# EAGLE board TSOC_RS485_EM (EAGLE 6.6.0)
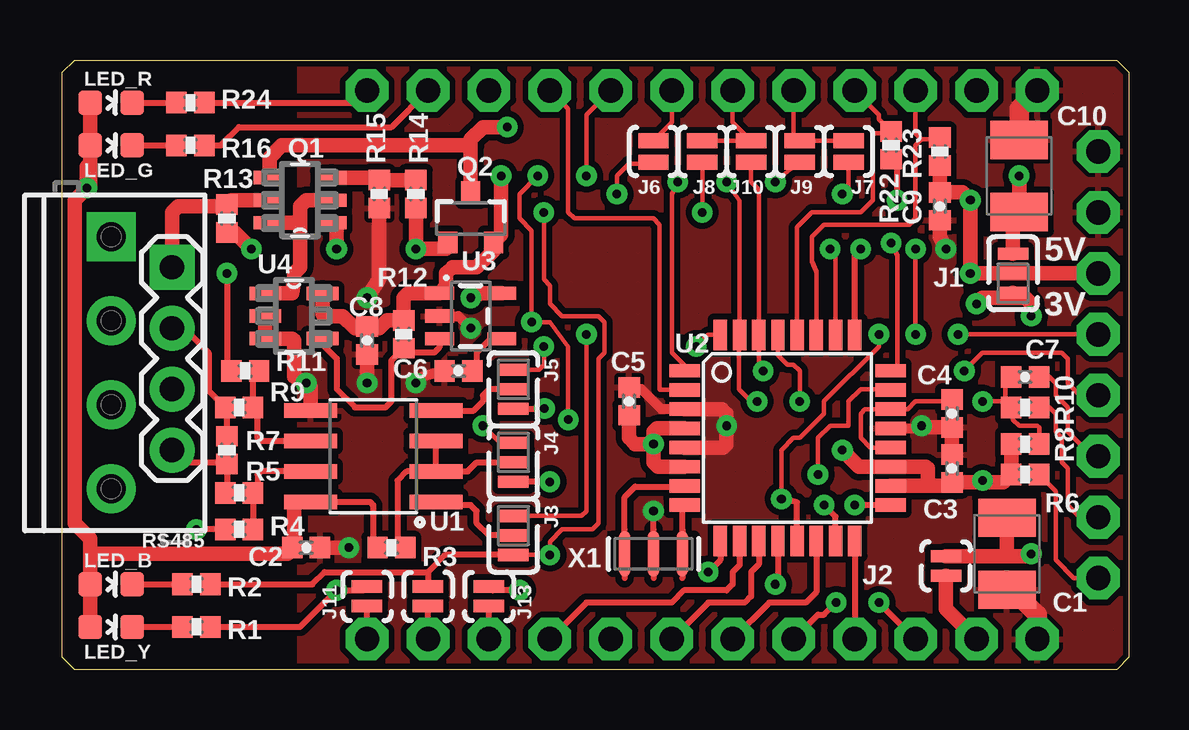
[diagram p0: board, top side]
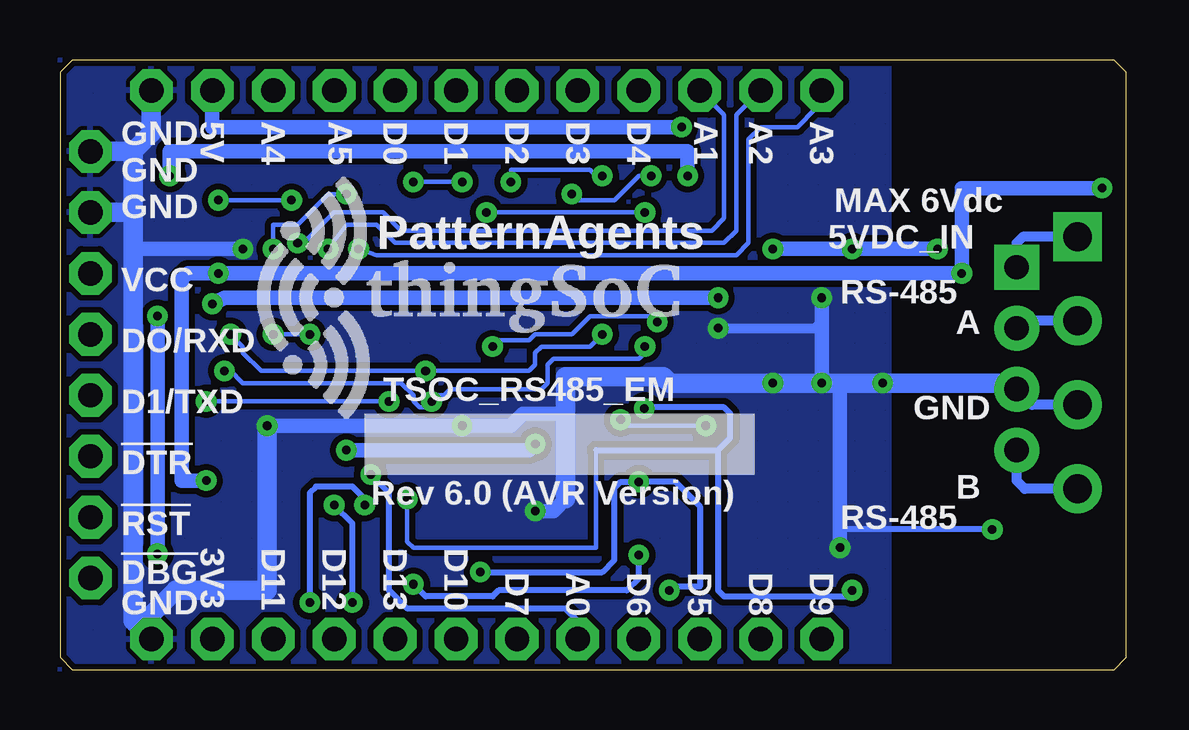
[diagram p1: board, bottom side, seen from below]

Size 44.45 x 25.4 mm. Coordinates in mm from the lower left corner, seen from the top.
Copper layers (1*16): Top 0.035mm / dielectric 1.5mm / Bottom 0.035mm
Design rules "PatternAgents_7mil": minimum track width 7mil, minimum drill 14mil, track to track 7mil, track to pad 7mil, pad to pad 7mil, via to via 7mil, smd to smd 7mil, copper to edge 7mil, drill to drill 7mil, minimum pad ring 12mil, minimum via ring 10mil, stop-mask expansion 4mil, vias tented up to drill 25mil, thermal gap 7mil
Net classes: 1 vcc: width 0.254 mm

## Footprints (pad centres in the part's own frame; a part is rotated, then mirrored left to right if it is on the bottom)
SMC_B = smd 1.6 x 2.4: + -1.5,0; - 1.5,0
0402-CAP = smd 0.85 x 0.9: 1 -0.58,0; 2 0.58,0
JMP-3-1_2 = smd 0.508 x 1.27: 1 -0.813,0; 2 0,0; 3 0.813,0
JMP-2-NC = smd 0.508 x 1.27: 1 -0.401,0; 2 0.413,0
JMP-2-NO = smd 0.635 x 1.27: 1 -0.45,0; 2 0.45,0
1X04 = drill 1.016 pad 1.88 square: 1 0,0 | drill 1.016 pad 1.88: 2 2.54,0; 3 5.08,0; 4 7.62,0
LED-0603 = smd 1 x 1: A 0,-0.877; C 0,0.877
SOT95P280X110-6N = smd 1.27 x 0.559: 1 -1.295,0.94; 2 -1.295,0; 3 -1.295,-0.94; 4 1.295,-0.94; 5 1.295,0; 6 1.295,0.94
SOT23-3 = smd 0.8 x 0.9: 1 -0.95,-1; 2 0.95,-1; 3 0,1.1
0402-RES = smd 0.85 x 0.9: 1 -0.58,0; 2 0.58,0
SCREWTERMINAL-3.5MM-4 = drill 1.2 pad 2.032 square: 1 0,0 | drill 1.2 pad 2.032: 2 3.5,0; 3 7,0; 4 10.5,0
TSOC-BB-S32 = drill 1.016 pad 1.778 octagon: 1B -11.43,-11.43; 1C -11.43,11.43; 1E 19.05,-8.89; 2B -8.89,-11.43; 2C -8.89,11.43; 2E 19.05,-6.35; 3B -6.35,-11.43; 3C -6.35,11.43; 3E 19.05,-3.81; 4B -3.81,-11.43; 4C -3.81,11.43; 4E 19.05,-1.27; 5B -1.27,-11.43; 5C -1.27,11.43; 5E 19.05,1.27; 6B 1.27,-11.43; 6C 1.27,11.43; 6E 19.05,3.81; 7B 3.81,-11.43; 7C 3.81,11.43; 7E 19.05,6.35; 8B 6.35,-11.43; 8C 6.35,11.43; 8E 19.05,8.89; 9B 8.89,-11.43; 9C 8.89,11.43; 10B 11.43,-11.43; 10C 11.43,11.43; 11B 13.97,-11.43; 11C 13.97,11.43; 12B 16.51,-11.43; 12C 16.51,11.43
SO08 = smd 0.61 x 2.21: 1 -1.905,-2.616; 2 -0.635,-2.616; 3 0.635,-2.616; 4 1.905,-2.616; 5 1.905,2.616; 6 0.635,2.616; 7 -0.635,2.616; 8 -1.905,2.616
TQFP32-08 = smd 1.27 x 0.559: 1 -4.293,2.8; 2 -4.293,2; 3 -4.293,1.2; 4 -4.293,0.4; 5 -4.293,-0.4; 6 -4.293,-1.2; 7 -4.293,-2; 8 -4.293,-2.8; 17 4.293,-2.8; 18 4.293,-2; 19 4.293,-1.2; 20 4.293,-0.4; 21 4.293,0.4; 22 4.293,1.2; 23 4.293,2; 24 4.293,2.8 | smd 0.559 x 1.27: 9 -2.8,-4.293; 10 -2,-4.293; 11 -1.2,-4.293; 12 -0.4,-4.293; 13 0.4,-4.293; 14 1.2,-4.293; 15 2,-4.293; 16 2.8,-4.293; 25 2.8,4.293; 26 2,4.293; 27 1.2,4.293; 28 0.4,4.293; 29 -0.4,4.293; 30 -1.2,4.293; 31 -2,4.293; 32 -2.8,4.293
SOT23-5 = smd 0.55 x 1.2: 1 -0.95,-1.3; 2 0,-1.3; 3 0.95,-1.3; 4 0.95,1.3; 5 -0.95,1.3
SOP95P275X110-5N = smd 1.321 x 0.559: 1 -1.194,0.94; 2 -1.194,0; 3 -1.194,-0.94; 4 1.194,-0.94; 5 1.194,0.94
RESONATOR-SMD = smd 0.45 x 1.905: 1 -1.2,0; 2 0,0; 3 1.2,0

## Placement (x,y rotation side)
C1  22uF  [SMC_B]  39.37,4.83 270 top
C2  0.1uF  [0402-CAP]  10.16,5.08 0 top
C3  0.1uF  [0402-CAP]  37.08,8.38 270 top
C4  0.1uF  [0402-CAP]  37.08,10.67 90 top
C5  0.1uF  [0402-CAP]  23.62,11.18 270 top
C6  470pF  [0402-CAP]  16.51,12.45 180 top
C7  0.1uF  [0402-CAP]  40.13,12.19 180 top
C8  0.1uF  [0402-CAP]  12.7,13.72 270 top
C9  0.1uF  [0402-CAP]  36.58,19.3 270 top
C10  22uF  [SMC_B]  39.88,20.57 90 top
J1  JMP-3-1_2  [JMP-3-1_2]  39.62,16.51 90 top
J2  JMP-2-NC  [JMP-2-NC]  36.83,4.32 270 top
J3  JMP-3-1_2  [JMP-3-1_2]  18.8,5.59 270 top
J4  JMP-3-1_2  [JMP-3-1_2]  18.8,8.64 270 top
J5  JMP-3-1_2  [JMP-3-1_2]  18.8,11.68 270 top
J6  [JMP-2-NO]  24.64,21.59 270 top
J7  [JMP-2-NO]  32.77,21.59 270 top
J8  [JMP-2-NO]  26.67,21.59 270 top
J9  [JMP-2-NO]  30.73,21.59 270 top
J10  [JMP-2-NO]  28.7,21.59 270 top
J11  JMP-2-NC  [JMP-2-NC]  12.7,3.05 90 top
J12  JMP-2-NC  [JMP-2-NC]  15.24,3.05 90 top
J13  JMP-2-NC  [JMP-2-NC]  17.78,3.05 90 top
JP1  [1X04]  4.57,16.76 270 top
LED_B  [LED-0603]  2.03,3.56 270 top
LED_G  [LED-0603]  2.03,21.84 270 top
LED_R  [LED-0603]  2.03,23.62 270 top
LED_Y  [LED-0603]  2.03,1.78 270 top
Q1  FDC6420C  [SOT95P280X110-6N]  9.91,19.56 180 top
Q2  MOSFET-NCHANNELAO3404A  [SOT23-3]  17.02,18.8 0 top
R1  1K  [0402-RES]  5.59,1.78 0 top
R2  1K  [0402-RES]  5.59,3.56 0 top
R3  10K  [0402-RES]  13.72,5.08 180 top
R4  4K7  [0402-RES]  7.37,5.84 180 top
R5  56  [0402-RES]  7.37,7.37 0 top
R6  DNP  [0402-RES]  40.13,8.13 0 top
R7  120  [0402-RES]  6.86,9.14 270 top
R8  10K  [0402-RES]  40.13,9.4 180 top
R9  56  [0402-RES]  7.37,10.92 0 top
R10  DNP  [0402-RES]  40.13,10.92 0 top
R11  4K7  [0402-RES]  7.62,12.45 0 top
R12  10K  [0402-RES]  14.22,13.97 90 top
R13  100  [0402-RES]  6.86,18.8 270 top
R14  4K7  [0402-RES]  14.73,19.81 90 top
R15  6K8  [0402-RES]  13.21,19.81 270 top
R16  1K  [0402-RES]  5.33,21.84 0 top
R22  4K7  [0402-RES]  34.54,21.84 90 top
R23  4K7  [0402-RES]  36.58,21.59 90 top
R24  1K  [0402-RES]  5.33,23.62 0 top
RS485  [SCREWTERMINAL-3.5MM-4]  2.03,18.03 270 top
TSOC  TSOC-32-BB  [TSOC-BB-S32]  24.13,12.7 0 top
U1  ST1480ACSOIC  [SO08]  12.95,8.89 90 top
U2  ATMEGA328  [TQFP32-08]  30.23,9.65 0 top
U3  MIC5219 3.3V  [SOT23-5]  17.02,14.73 270 top
U4  NCP361SNT1G  [SOP95P275X110-5N]  9.65,14.73 0 top
U$1  TSOC-PCB-EM-45  [TSOC-EM-BB-45MM]  23.62,12.7 0 top
U$100  TSOC-LOGO-LRG  [TSOC-LOGO-LRG]  33.02,15.49 0 bottom
X1  8MHZ  [RESONATOR-SMD]  24.64,4.83 180 top

## Library data of the parts
C1 C10 = rcl
C2-C9 LED_B LED_G LED_R LED_Y R1-R16 R22-R24 U1 = TSOC-MODBUS-ESM
J1 = PatternAgents-ProtoPads; BOM: EXCLUDE
J2 J11-J13 = TSOC-MODBUS-ESM; BOM: EXCLUDE
J3-J10 = TSOC_RS485_EM; BOM: EXCLUDE
JP1 U$1 = TSOC_RS485_EM
Q1 = TSOC-ESP8266-BASE
Q2 = SparkFun-DiscreteSemi; PROD_ID: TRAN-12988
RS485 = TSOC_RS485_EM; PROD_ID: Combine 2x8399
TSOC U$100 = thingSoC
U2 = SparkFun
U3 = TSOC-ESP8266-BASE; PROD_ID: VREG-09872
U4 = TSOC-ESP8266-BASE; MPN: NCP361SNT1G; OC_FARNELL: 1642242; OC_NEWARK: 01P0135; PACKAGE: TSOP-5; SUPPLIER: ON Semiconductor
X1 = TSOC_RS485_EM; PROD_ID: XTAL-08895

## Nets
3V3: C1.+ J1.1 J2.1 U3.5
5V0: C8.1 C10.+ J1.3 Q2.2 R12.2 U3.1 U4.5
!5V0_FAULT: R12.1 U3.3 U4.4
!JDBG: R6.2 TSOC.1E
!JRST: C7.1 TSOC.3E
!RST: C7.2 R8.1 R10.1 U2.29
A: R9.2 R11.2 U1.6
A0: TSOC.5B U2.23
A1: TSOC.3C U2.24
A2: R16.2 TSOC.2C U2.25
A3: R24.2 TSOC.1C U2.26
A4: R23.2 TSOC.10C U2.27
A5: R22.2 TSOC.9C U2.28
AO: JP1.2 R7.1 R9.1 RS485.2
AREF: C4.2 U2.20 U2.22
B: R4.1 R5.2 U1.7
BO: JP1.4 R5.1 R7.2 RS485.4
BYPASS1: C6.1 U3.4
D0: J3.1 J10.2 TSOC.5E U2.30
D1: J5.1 J9.2 TSOC.4E U2.31
D2: J4.1 J6.2 U2.32
D3: TSOC.5C U2.1
D4: TSOC.4C U2.2
D5: J4.3 J13.2 U2.9
D6: TSOC.4B U2.10
D7: TSOC.6B U2.11
D8: J3.3 J8.2 J12.2 R2.2 U2.12
D9: J5.3 J7.2 J11.2 R1.2 U2.13
D10: TSOC.7B U2.14
D11: TSOC.10B U2.15
D12: TSOC.9B U2.16
D13: TSOC.8B U2.17
DE: J4.2 R3.1 U1.2 U1.3
DI: J5.2 U1.4
EXT_5V0: JP1.1 Q1.5 R13.1 RS485.1
GND: C1.- C2.2 C3.1 C4.1 C5.1 C6.2 C8.2 C9.2 C10.- JP1.3 R4.2 R15.2 RS485.3 TSOC.7E TSOC.8E TSOC.12B TSOC.12C U1.5 U2.3 U2.5 U2.21 U3.2 U4.2 U4.3 X1.2
JTDO: R10.2 TSOC.2E
LEDB: LED_B.C R2.1
LEDG: LED_G.C R16.1
LEDR: LED_R.C R24.1
LEDY: LED_Y.C R1.1
N$1: J13.1 TSOC.3B
NGATE: Q1.1 Q2.1 R13.2 R14.1
PGATE: Q1.3 R14.2 R15.1
RXD: J3.2 U1.1
TSOC_3V3: J2.2 TSOC.11B
TSOC_5V0: Q1.4 Q2.3 TSOC.11C
TSOC_CTS: J6.1 TSOC.6C
TSOC_D8: J12.1 TSOC.2B
TSOC_D9: J11.1 TSOC.1B
TSOC_RXD: J8.1 J10.1 TSOC.7C
TSOC_TXD: J7.1 J9.1 TSOC.8C
VCC: C2.1 C3.2 C5.2 C9.1 J1.2 LED_B.A LED_G.A LED_R.A LED_Y.A R3.2 R6.1 R8.2 R11.1 R22.1 R23.1 TSOC.6E U1.8 U2.4 U2.6 U2.18 U2.19
VIN: Q1.2 Q1.6 U4.1
XIN: U2.7 X1.3
XOUT: U2.8 X1.1

## Tracks (layer width: path | path; a pad name or v marks a point on that pad's centre or on a via)
3V3  (via drill 0.36)
  Top 0.61: J2.1 39.37,4.72 | 39.37,4.72 40.28,4.72 v40.39,4.83 | U3.5 17.46,15.68 v17.02,15.49 | C1.+ 39.37,4.72 | v40.39,14.73 40.39,15.24 40.13,15.49 39.62,15.49 | 39.62,15.49 38.35,15.49 v38.1,15.24 | J1.1 39.62,15.49
  Bottom 0.61: v17.02,15.49 37.59,15.49 v38.1,15.24 | v40.39,4.83 v40.39,14.73
5V0  (via drill 0.36)
  Top 0.61: v39.88,20.57 C10.+ 39.62,18.82 J1.3 | v18.29,20.57 18.29,18.12 Q2.2 17.97,17.46 17.27,16.76 16.26,16.76 16,16.51 16,15.97 U3.1 14.41,15.68 14.22,15.49 R12.2 13.53,14.55 13.21,14.22 12.77,14.22 C8.1 12.63,14.22 12.19,14.22 11.68,14.73 10.92,14.73 10.85,14.81 U4.5
  Bottom 0.61: v18.29,20.57 18.29,21.59 39.88,21.59 v39.88,20.57
!5V0_FAULT
  Top 0.254: U4.4 10.85,13.54 11.43,12.95 11.43,11.68 12.19,10.92 13.46,10.92 13.72,11.18 13.72,12.88 R12.1 14.41,13.21 15.49,13.21 15.72,13.43 U3.3
!JDBG
  Top 0.178: TSOC.1E 42.16,3.81 41.4,4.57 41.4,7.44 R6.2
!JRST
  Top 0.178: TSOC.3E 42.93,8.89 41.91,9.91 41.91,10.92 41.4,11.43 41.4,11.94 41.15,12.19 C7.1
!RST  (via drill 0.36)
  Top 0.178: R8.1 40.71,10.09 40.64,10.16 39.88,10.16 39.62,10.41 39.62,10.85 R10.1 39.3,11.18 | v38.35,11.18 39.3,11.18 | 39.3,11.18 39.3,11.94 C7.2 | U2.29 29.83,13.1 30.23,12.7 30.48,12.7 30.73,12.45 v30.73,11.18
  Bottom 0.178: v30.73,11.18 v38.35,11.18
A
  Top 0.254: U1.6 8.26,9.53 8.13,9.65 8.13,10.74 R9.2 7.95,12.19 R11.2
A0  (via drill 0.36)
  Top 0.178: 34.49,11.68 33.27,11.68 32.77,11.18 32.77,10.16 32,10.16 31.5,9.65 v31.5,8.13
  Top 0.254: 34.49,11.68 U2.23
  Bottom 0.254: TSOC.5B 22.86,2.03 23.37,2.54 29.97,2.54 30.73,3.3 30.73,7.37 v31.5,8.13
A1  (via drill 0.36)
  Top 0.178: U2.24 34.8,12.48 34.8,17.27 v34.54,17.78
  Bottom 0.178: TSOC.3C 16.76,23.11 16.76,18.8 17.27,18.29 30.23,18.29 30.99,19.05 33.02,19.05 34.29,17.78 v34.54,17.78
A2  (via drill 0.36)
  Top 0.254: R16.2 6.6,21.84 7.37,22.61 13.72,22.61 TSOC.2C | U2.25 33.03,17.28 v33.27,17.53
  Bottom 0.178: v33.27,17.53 32.51,18.54 31.24,18.54 30.48,17.78 16.76,17.78 16.26,18.29 16.26,23.11 TSOC.2C
A3  (via drill 0.36)
  Top 0.178: U2.26 32.23,17.3 v32,17.53
  Top 0.254: R24.2 12.19,23.62 TSOC.1C
  Bottom 0.178: v32,17.53 31.24,17.27 16.26,17.27 15.75,17.78 15.75,22.1 15.24,22.61 13.72,22.61 12.95,23.37 12.95,23.88 TSOC.1C
A4
  Top 0.178: U2.27 31.43,16.58 31.24,17.02 31.24,18.03 31.75,18.54 35.31,18.54 35.56,18.8 35.56,21.84 35.81,22.1 | 35.81,22.1 36.5,22.1 R23.2 | TSOC.10C 35.56,22.35 35.81,22.1
A5
  Top 0.178: U2.28 30.63,18.43 31.24,19.05 33.27,19.05 33.78,19.56 33.78,22.35 34.47,22.35 R22.2 34.04,22.93 34.04,23.11 TSOC.9C
AO
  Top 0.254: R7.1 6.86,10.85 R9.1 6.1,11.61 6.1,13.21 5.08,14.22 JP1.2
  Bottom 0.406: RS485.2 4.26,14.53 JP1.2
AREF
  Top 0.178: U2.20 33.67,9.25 33.27,9.65 33.27,10.67 33.46,10.85 U2.22 35.24,10.85 35.56,11.18 37.01,11.18 C4.2
B
  Top 0.254: R4.1 R5.2 8.13,7.55 8.13,8.13 8.26,8.26 U1.7
BO
  Top 0.254: JP1.4 5.08,8.64 6.79,8.64 R7.2 6.86,7.44 R5.1
  Bottom 0.406: RS485.4 4.23,7.53 4.57,7.87 JP1.4
BYPASS1
  Top 0.254: U3.4 17.85,13.78 17.27,13.21 17.27,12.63 C6.1
D0  (via drill 0.36)
  Top 0.178: J3.1 21.64,6.4 21.84,6.6 v21.84,13.97 | v37.34,13.97 TSOC.5E | J10.2 28.7,20.32 29.03,20 U2.30 29.03,12.63 29.11,12.62 29.11,12.45 v29.21,12.45
  Bottom 0.178: v37.34,13.97 36.83,13.46 36.83,13.21 36.07,12.45 v29.21,12.45 24.89,12.45 24.64,12.7 24.64,13.21 24.38,13.46 22.35,13.46 v21.84,13.97 22.1,13.97
D1  (via drill 0.36)
  Top 0.178: J5.1 19.86,12.5 20.07,12.7 v20.07,13.46 | TSOC.4E 42.42,11.43 41.91,11.94 41.91,12.95 41.66,13.21 38.35,13.21 v37.59,12.45 | v28.96,11.18 28.7,11.18 28.19,11.68 28.19,13.91 U2.31 28.23,19.53 v27.69,20.32 | v29.72,20.32 29.72,20.38 J9.2
  Bottom 0.178: v37.59,12.45 37.34,12.45 36.83,11.94 30.23,11.94 29.72,11.43 29.72,11.18 29.46,10.92 29.21,10.92 v28.96,11.18 28.7,11.43 28.45,11.43 28.19,11.68 24.38,11.68 24.13,11.94 24.13,12.7 23.88,12.95 20.32,12.95 20.07,13.21 v20.07,13.46 | v27.69,20.32 v29.72,20.32
D2  (via drill 0.36)
  Top 0.178: J4.1 18.24,9.45 v17.53,10.16 | v21.08,10.41 21.08,13.46 20.32,14.48 v19.56,14.48 19.56,18.29 19.05,18.8 19.05,19.81 v19.81,20.57 | U2.32 26.9,13.95 v26.42,13.46 | v23.11,19.81 23.11,20.57 23.62,21.08 24.58,21.08 J6.2
  Bottom 0.178: v17.53,10.16 20.83,10.16 v21.08,10.41 | v19.81,20.57 20.32,20.57 21.34,19.56 22.86,19.56 v23.11,19.81 | v19.56,14.48 19.81,14.73 22.35,14.73 23.11,13.97 24.64,13.97 24.89,13.72 26.42,13.72 26.44,13.69 26.44,13.51 v26.42,13.46
D3  (via drill 0.36)
  Top 0.178: U2.1 25.93,12.68 25.4,13.21 25.4,19.81 v25.65,20.32 | v21.84,20.57 21.84,23.11 TSOC.5C
  Bottom 0.178: v21.84,20.57 22.1,20.57 22.35,20.83 25.65,20.83 v25.65,20.32
D4
  Top 0.178: U2.2 24.92,11.65 24.89,11.68 24.89,18.54 24.64,18.8 21.34,18.8 21.08,19.05 21.08,23.37 TSOC.4C
D5  (via drill 0.36)
  Top 0.254: v20.32,7.82 J4.3 | v19.05,3.3 17.94,3.3 J13.2 | U2.9 27.43,4.57 v26.92,4.06
  Bottom 0.254: 20.37,7.87 v20.32,7.82 | v20.32,7.82 J4.3 17.78,6.81 J13.2 18.89,3.46 v19.05,3.3 | v26.92,4.06 21.84,4.06 21.34,4.57 21.34,7.57 21.08,7.82 v20.32,7.82
D6
  Top 0.254: U2.10 28.23,4.35 27.94,4.06 27.94,3.56 27.69,3.3 25.91,3.3 25.4,2.79 21.84,2.79 TSOC.4B
D7
  Top 0.254: U2.11 29.03,4.39 28.7,4.06 28.7,3.05 28.45,2.79 26.92,2.79 TSOC.6B
D8  (via drill 0.36)
  Top 0.178: J3.3 v20.32,4.78 20.32,5.33 20.83,5.84 22.1,5.84 22.35,6.1 22.35,12.95 22.61,13.21 22.61,14.48 22.35,14.73 20.83,14.73 20.32,15.24 20.32,16 20.07,16.26 v20.07,19.05 | J8.2 v26.67,19.05
  Top 0.254: U2.12 29.83,3.66 v29.72,3.56 | R2.2 10.41,3.56 10.92,4.06 15.24,4.06 | 15.24,4.06 J12.2 | J3.3 15.95,4.78 15.24,4.06
  Bottom 0.178: v20.07,19.05 v26.67,19.05
  Bottom 0.254: v20.32,4.78 20.32,3.81 20.83,3.3 26.16,3.3 26.42,3.05 29.21,3.05 v29.72,3.56
D9  (via drill 0.36)
  Top 0.178: J5.3 19.3,10.87 | J7.2 32.77,20.07 v32.51,19.81 | v35.56,17.53 v35.56,13.97 | v34.04,13.97 34.04,13.46 31.75,11.18 31.75,10.67 30.73,9.65 30.48,9.65 29.97,9.14 v29.97,7.11
  Top 0.254: U2.13 30.63,6.97 v29.97,7.11 | 19.31,10.88 19.3,10.87 v20.09,10.87 v20.09,10.88 20.14,10.92 | J11.2 12.54,3.3 v11.43,3.3 9.91,1.78 R1.2
  Bottom 0.178: 22.1,9.14 22.1,5.08 29.72,5.08 29.97,5.33 v29.97,7.11 | v32.51,19.81 33.27,19.81 34.54,18.54 35.56,18.54 v35.56,17.53 | v35.56,13.97 v34.04,13.97
  Bottom 0.254: 17.02,9.14 17.02,3.3 16.76,3.05 11.68,3.05 v11.43,3.3 | 20.14,10.92 v20.09,10.88 20.05,10.92 16.76,10.92 16.51,10.67 16.51,9.65 17.02,9.14 | 22.1,9.14 17.02,9.14
D10
  Top 0.254: U2.14 31.43,3.23 30.99,2.79 29.46,2.79 TSOC.7B
D11  (via drill 0.36)
  Top 0.254: U2.15 32.23,6.38 v31.75,6.86 | v34.04,2.79 TSOC.10B
  Bottom 0.254: v31.75,6.86 31.75,7.11 32.26,7.62 33.78,7.62 34.04,7.37 v34.04,2.79
D12
  Top 0.254: U2.16 TSOC.9B
D13  (via drill 0.36)
  Top 0.254: U2.17 v33.03,6.85 v33.02,6.86 | TSOC.8B 31.5,2.29 31.75,2.29 v32.26,2.79
  Bottom 0.254: v32.26,2.79 32.26,6.1 v33.02,6.86
DE
  Top 0.254: U1.2 U1.3 | U1.2 16.89,8.26 17.27,8.64 J4.2 | U1.2 14.35,8.26 13.97,7.87 13.97,5.41 R3.1
DI
  Top 0.254: J5.2 17.78,11.68 17.53,11.43 17.53,11.18 17.15,10.79 U1.4
EXT_5V0
  Top 0.61: JP1.1 4.57,19.05 4.83,19.3 6.79,19.3 R13.1 7.04,19.56 Q1.5
  Bottom 0.406: RS485.1 4.32,18.03 4.57,17.78 JP1.1
GND  (via drill 0.36)
  Top 0.254: R4.2 v5.59,5.84 | 24.64,5.84 v24.64,6.6
  Top 0.406: U3.2 16.51,14.73 v17.02,14.22 | C6.2 14.99,12.19 v14.73,11.94 | U2.21 35.96,10.05 v35.81,10.16 | C5.1 23.69,11.68 24.13,11.68 24.96,10.85 U2.3
  Top 0.61: U1.5 10.34,11.76 v10.16,11.94 9.65,12.19 9.65,13.72 9.58,13.79 U4.3 U4.2 | C2.2 v11.94,5.08 | U2.5 27.54,9.25 27.69,9.4 v27.69,10.16 27.69,10.67 | R15.2 13.21,16.26 v12.7,15.49 | C8.2 v12.7,11.94 | 27.5,10.85 U2.3 | v35.81,10.16 35.89,10.09 C4.1 C3.1 | C9.2 36.58,18.03 v36.83,17.53
  Top 0.813: C10.- 39.88,23.37 TSOC.12C | C1.- 39.6,3.33 40.64,2.29 TSOC.12B
  Bottom 0.254: v5.59,5.84 11.94,5.84
  Bottom 0.406: RS485.3 3.92,11.03 JP1.3 | v17.02,14.22 12.95,14.22 12.7,14.48
  Bottom 0.61: v11.94,5.08 11.94,5.84 11.94,11.94 | v24.64,6.6 23.88,6.6 23.37,7.11 | 23.37,10.67 25.15,10.67 25.65,10.16 v27.69,10.16 v35.81,10.16 | v12.7,15.49 12.7,14.48 12.7,12.19 12.45,11.94 | v36.83,17.53 41.4,17.53
  Bottom 0.813: 41.4,19.05 41.4,21.59 | 41.4,21.59 TSOC.8E | TSOC.7E 41.4,19.05 | TSOC.12C 40.64,22.35 41.4,21.59 | 41.4,19.05 41.4,17.53 41.4,2.03 TSOC.12B 40.64,2.29 39.62,3.3 35.81,3.3 v35.81,10.16 | JP1.3 4.83,11.94 v10.16,11.94 11.94,11.94 12.45,11.94 v12.7,11.94 v14.73,11.94 19.05,11.94 19.3,12.19 23.37,12.19 23.37,10.67 23.37,7.11
  pour Top (isolate 0.254, hatched): 9.91,0 9.91,25.4 44.45,25.4 44.45,0
  pour Bottom (isolate 0.254, hatched): 9.91,0 9.91,25.4 44.45,25.4 44.45,0
  pour Top (isolate 0.254, hatched): 9.91,0 9.91,25.4 44.45,25.4 44.45,0
JTDO
  Top 0.178: TSOC.2E 42.42,6.35 41.91,6.86 41.91,8.38 41.66,8.64 41.66,9.65 41.4,9.91 41.4,10.67 41.15,10.92 R10.2
LEDB
  Top 0.254: LED_B.C R2.1
LEDG
  Top 0.254: LED_G.C R16.1
LEDR
  Top 0.254: LED_R.C R24.1
LEDY
  Top 0.254: LED_Y.C R1.1
N$1
  Top 0.254: TSOC.3B J13.1
NGATE  (via drill 0.36)
  Top 0.61: R13.2 7.18,18.22 v7.87,17.53 | v11.43,17.53 11.43,18.39 Q1.1 | Q2.1 16.07,17.59 16,17.53 v14.73,17.53 R14.1
  Bottom 0.61: v7.87,17.53 v11.43,17.53 v14.73,17.53
PGATE
  Top 0.61: Q1.3 13.1,20.5 R15.1 R14.2
RXD
  Top 0.254: J3.2 17.78,5.59 17.27,6.1 17.27,6.6 17.02,6.86 15.7,6.86 U1.1
TSOC_3V3
  Top 0.61: J2.2 36.83,2.54 TSOC.11B
TSOC_5V0  (via drill 0.36)
  Top 0.178: Q1.4 8.66,20.62 8.64,20.83
  Top 0.61: Q2.3 17.02,21.84 | 17.02,21.84 17.02,22.1 17.53,22.61 v18.54,22.61 | 8.64,20.83 8.64,21.34 9.14,21.84 17.02,21.84
  Bottom 0.61: TSOC.11C 38.1,22.61 v18.54,22.61
TSOC_CTS
  Top 0.178: TSOC.6C 25.4,22.8 J6.1
TSOC_D8
  Top 0.254: TSOC.2B J12.1
TSOC_D9
  Top 0.254: TSOC.1B J11.1
TSOC_RXD
  Top 0.178: J8.1 J10.1 27.94,22.8 TSOC.7C
TSOC_TXD
  Top 0.178: TSOC.8C 30.48,22.29 J9.1 J7.1
VCC  (via drill 0.36)
  Top 0.254: U1.8 12.83,6.99 12.95,6.86 12.95,5.26 R3.2 | v6.86,16.51 6.86,12.63 R11.1 | v34.8,19.56 34.8,21.01 R22.1
  Top 0.406: 24.46,9.58 v24.64,9.4
  Top 0.61: LED_R.A LED_G.A 1.16,21.08 | 1.16,21.08 1.16,20.2 v1.02,20.07 | v1.02,20.07 0.51,19.56 0.51,6.1 1.16,5.45 1.16,4.83 | LED_Y.A LED_B.A 1.16,4.83 | TSOC.6E J1.2 v37.85,16.51 v37.85,19.56 37.52,19.88 C9.1 R23.1 | 1.16,4.83 9.4,4.83 9.58,5.01 C2.1 9.65,5.15 9.65,6.86 9.78,6.99 U1.8 | v1.02,20.07 1.02,20.94 1.16,21.08 | v32.51,9.14 33.2,8.45 U2.19 36,8.45 36.07,8.38 36.07,7.65 | U2.4 24.78,10.05 24.64,9.91 v24.64,9.4 | U2.6 24.82,8.45 24.64,8.64 v24.64,9.4 | R8.2 R6.1 39.23,7.8 38.43,7.8 v38.35,7.87 38.28,7.8 C3.2 37.19,7.65 36.07,7.65 | U2.18 36.07,7.65 | C5.2 23.62,9.65 23.88,9.4 v24.64,9.4
  Bottom 0.178: v34.8,19.56 v37.85,19.56
  Bottom 0.61: v1.02,20.07 6.86,20.07 v6.86,16.51 v37.85,16.51 39.12,16.51 39.37,16.26 39.37,7.87 v38.35,7.87 | v32.51,9.14 24.89,9.14 v24.64,9.4
VIN
  Top 0.61: Q1.2 10.16,19.56 9.91,19.3 9.91,18.54 | 9.91,18.54 9.91,16.76 9.65,16.51 9.65,16.26 9.58,15.67 U4.1 | Q1.6 9.83,18.62 9.91,18.54
XIN
  Top 0.254: 23.44,5.84 23.44,7.18 23.88,7.62 25.9,7.62 U2.7
XOUT
  Top 0.178: 25.84,5.69 25.91,5.69 X1.1
  Top 0.254: 25.84,4.57 X1.1 25.84,5.69 25.84,6.76 U2.8

## Text on the board
tPlace: 5V | 3V
bPlace: A3 | A2 | A1 | D4 | D3 | D2 | D1 | D0 | A5 | A4 | 5V | GND | GND | MAX 6Vdc | GND | 5VDC_IN | PatternAgents | VCC | RS-485 | A | DO/RXD | TSOC_RS485_EM | D1/TXD | GND | !DTR | B | Rev 6.0 (AVR Version) | RS-485 | !RST | D10 | D13 | D12 | D11 | 3V3 | D9 | D8 | D5 | D6 | A0 | D7 | !DBG | GND